# EAGLE board Board_Version_1_27_2015 (EAGLE 6.5.0)
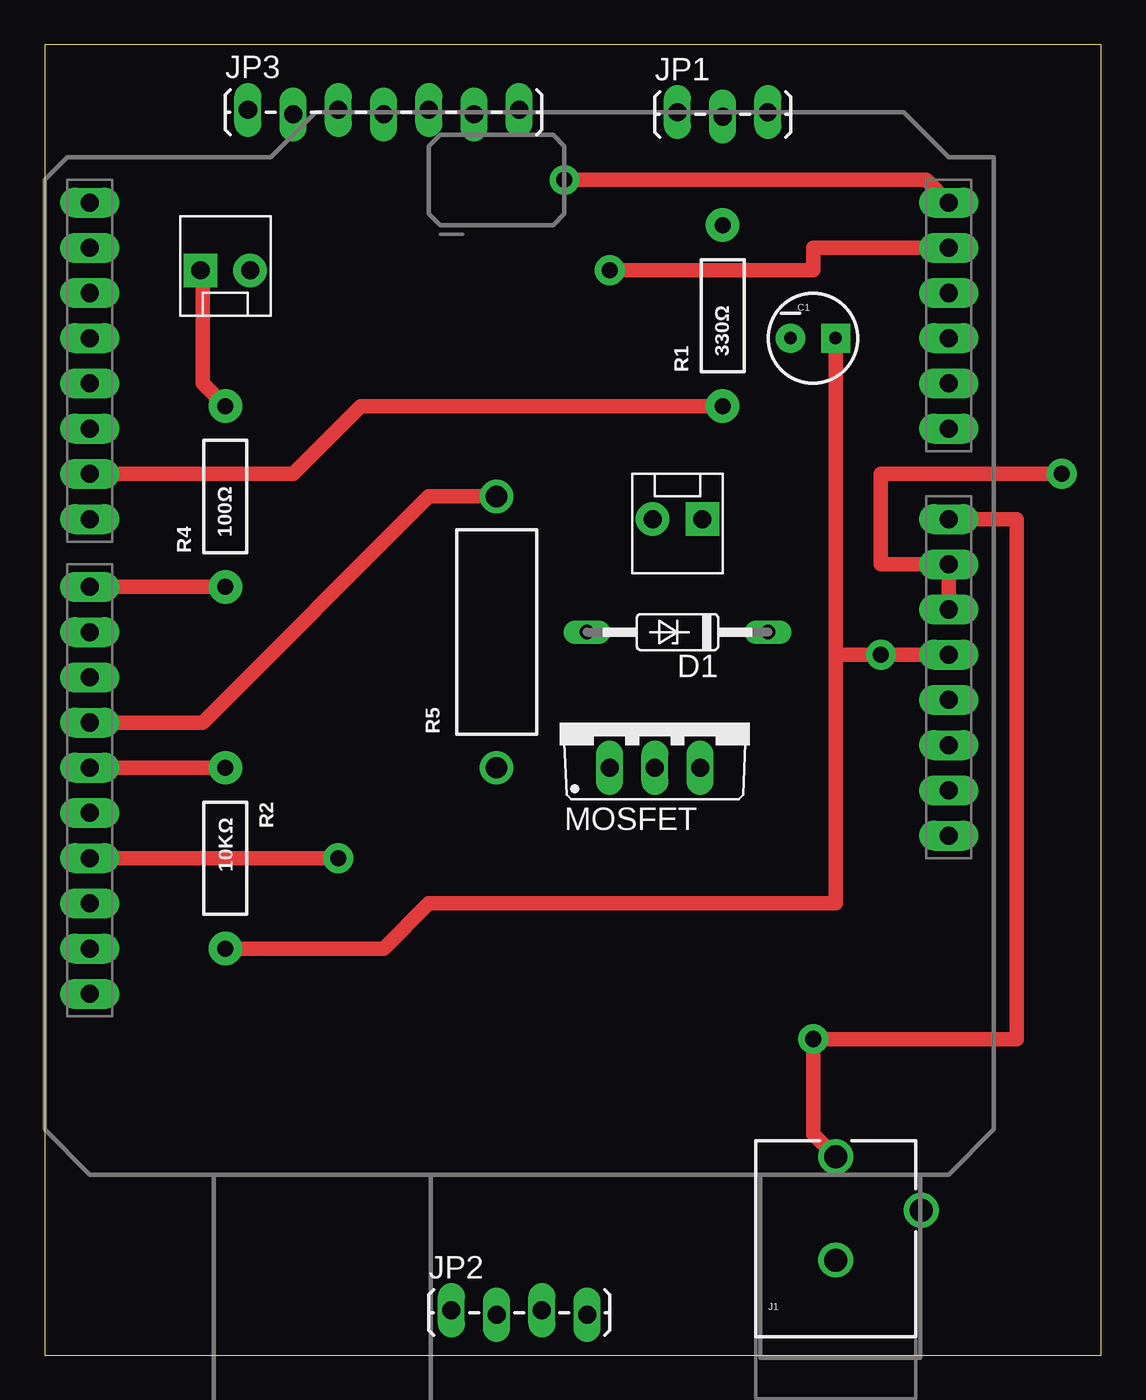
[diagram p0: board, top side]
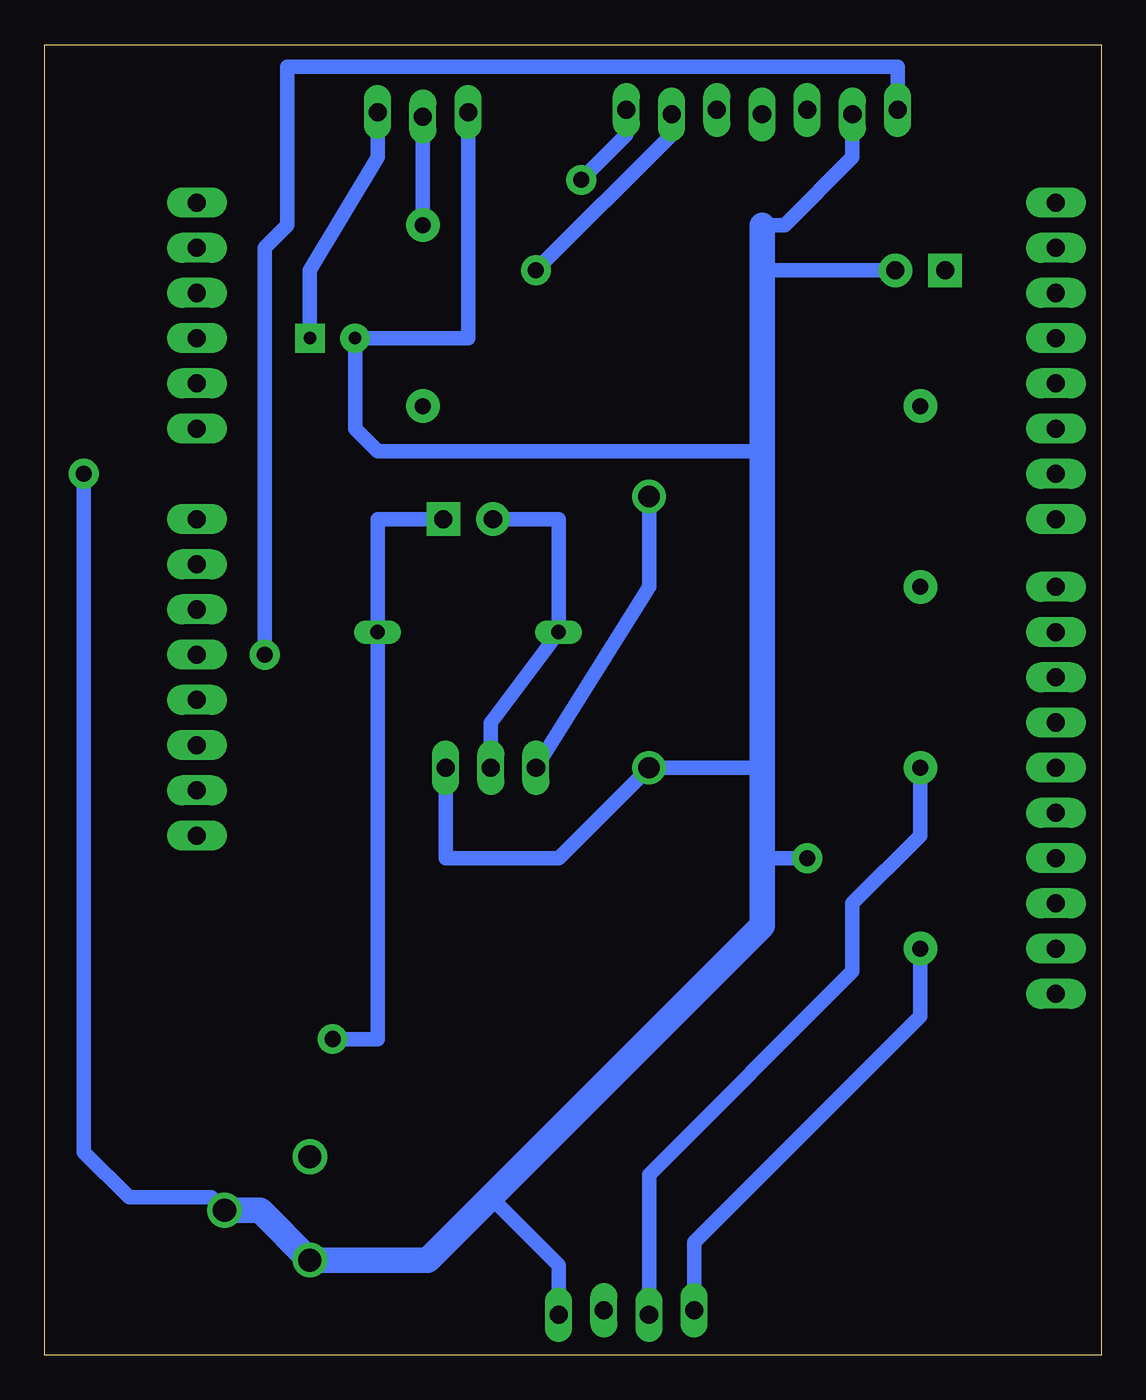
[diagram p1: board, bottom side, seen from below]

Size 59.36 x 73.65 mm. Coordinates in mm from the lower left corner, seen from the top.
Outline: 0,0 59.36,0 59.36,73.65 0,73.65 0,0
Copper layers (1*16): Top 0.035mm / dielectric 1.5mm / Bottom 0.035mm
Design rules "default": minimum track width 10mil, minimum drill 24mil, track to track 8mil, track to pad 8mil, pad to pad 8mil, via to via 8mil, smd to smd 8mil, copper to edge 40mil, drill to drill 8mil, minimum pad ring 10mil, minimum via ring 8mil, stop-mask expansion 4mil, vias tented up to drill 0mil, thermal gap 10mil

## Footprints (pad centres in the part's own frame; a part is rotated, then mirrored left to right if it is on the bottom)
CPOL-RADIAL-10UF-25V = drill 0.7 pad 1.651 square: 1 1.27,0 | drill 0.7 pad 1.651: 2 -1.27,0
DO35Z10 = drill 0.813 long: A 5.08,0; C -5.08,0
POWER_JACK_PTH_BREAD = drill 1.3: GND 0,7.9; GNDBREAK 4.8,10.7; PWR 0,13.7
1X03_LOCK_LONGPADS = drill 1.016 long: 1 0,0; 2 2.54,-0.254; 3 5.08,0
1X04_LOCK_LONGPADS = drill 1.016 long: 1 0,0; 2 2.54,-0.254; 3 5.08,0; 4 7.62,-0.254
1X07_LOCK_LONGPADS = drill 1.016 long: 1 0,0.127; 2 2.54,-0.127; 3 5.08,0.127; 4 7.62,-0.127; 5 10.16,0.127; 6 12.7,-0.127; 7 15.24,0.127
MOLEX-1X2_LOCK = drill 1.016 pad 1.88 square: 1 -0.127,0 | drill 1.016 pad 1.88: 2 2.667,0
TO220BV = drill 1.016 long: D 0,-2.54; G -2.54,-2.54; S 2.54,-2.54
AXIAL-0.4 = drill 0.9 pad 1.88: P$1 -5.08,0; P$2 5.08,0
AXIAL-0.6 = drill 1.2 pad 1.88: P$1 -7.62,0; P$2 7.62,0
UNO_R3_SHIELD_NOLABELS = drill 1.016 pad 1.676 long: 3.3V 50.8,26.67; 5V 50.8,29.21; A0 50.8,41.91; A1 50.8,44.45; A2 50.8,46.99; A3 50.8,49.53; A4 50.8,52.07; A5 50.8,54.61; AREF 2.54,15.24; D2 2.54,49.53; D3 2.54,46.99; D4 2.54,44.45; D5 2.54,41.91; D6 2.54,39.37; D7 2.54,36.83; D8 2.54,33.02; D9 2.54,30.48; D10 2.54,27.94; D11 2.54,25.4; D12 2.54,22.86; D13 2.54,20.32; GND@0 50.8,31.75; GND@1 50.8,34.29; GND@2 2.54,17.78; IOREF 50.8,21.59; NC 50.8,19.05; RES 50.8,24.13; RX 2.54,54.61; SCL 2.54,10.16; SDA 2.54,12.7; TX 2.54,52.07; VIN 50.8,36.83

## Placement (x,y rotation side)
C1  100uF  [CPOL-RADIAL-10UF-25V]  43.18,57.15 0 top
D1  1N821  [DO35Z10]  35.56,40.64 180 top
J1  POWER_JACKPTH_BREAD  [POWER_JACK_PTH_BREAD]  44.45,-2.54 0 top
JP1  [1X03_LOCK_LONGPADS]  35.56,69.85 0 top
JP2  [1X04_LOCK_LONGPADS]  22.86,2.54 0 top
JP3  [1X07_LOCK_LONGPADS]  11.43,69.85 0 top
JP4  M02POLAR_LOCK  [MOLEX-1X2_LOCK]  36.83,46.99 180 top
JP5  M02POLAR_LOCK  [MOLEX-1X2_LOCK]  8.89,60.96 0 top
MOSFET  30N06L  [TO220BV]  34.29,35.56 0 top
R1  330Ω  [AXIAL-0.4]  38.1,58.42 90 top
R2  10KΩ  [AXIAL-0.4]  10.16,27.94 270 top
R4  100Ω  [AXIAL-0.4]  10.16,48.26 90 top
R5  [AXIAL-0.6]  25.4,40.64 90 top
U$1  ARDUINO_R3_SHIELDNOLABELS  [UNO_R3_SHIELD_NOLABELS]  0,10.16 0 top

## Library data of the parts
C1 R1 R2 = SparkFun-Passives
D1 = diode
J1 = SparkFun-Connectors; PROD_ID: PRT-10811
JP1-JP5 = SparkFun-Connectors
MOSFET = transistor-power
R4 R5 = SparkFun-Resistors
U$1 = SparkFun-Boards

## Nets
5V: C1.1 JP1.3 JP2.1 JP3.1 R2.P$2 U$1.5V
DHT22: JP2.2 R2.P$1 U$1.D12
GND: C1.2 J1.GND J1.GNDBREAK JP1.1 JP2.4 JP3.2 JP5.2 MOSFET.S R5.P$1 U$1.GND@0 U$1.GND@1 U$1.GND@2
M_GATE: MOSFET.G R5.P$2 U$1.D11
N$1: JP1.2 R1.P$2
N$2: R4.P$1 U$1.D8
N$4: R1.P$1 U$1.D6
N$5: D1.A JP4.2 MOSFET.D
N$6: JP5.1 R4.P$2
SCL: JP3.7 U$1.A5
SDA: JP3.6 U$1.A4
VIN: D1.C J1.PWR JP4.1 U$1.VIN

## Tracks (layer width: path | path; a pad name or v marks a point on that pad's centre or on a via)
5V  (via drill 0.9 pad 1.68)
  Top 0.813: C1.1 44.45,39.37 | 44.45,39.37 v46.99,39.37 U$1.5V | 44.45,39.37 44.45,25.4 21.59,25.4 19.05,22.86 R2.P$2
  Bottom 0.813: C1.1 44.45,60.96 40.64,67.31 JP1.3 | JP2.1 22.86,6.35 10.16,19.05 R2.P$2 | JP3.1 11.43,72.39 45.72,72.39 45.72,63.5 46.99,62.23 v46.99,39.37
DHT22
  Top 0.813: U$1.D12 R2.P$1
  Bottom 0.813: JP2.2 25.4,10.16 13.97,21.59 13.97,25.4 10.16,29.21 R2.P$1
GND  (via drill 0.9 pad 1.68)
  Top 0.813: U$1.GND@2 v16.51,27.94 | U$1.GND@0 U$1.GND@1 46.99,44.45 46.99,49.53 v57.15,49.53
  Bottom 0.813: MOSFET.S 36.83,27.94 30.48,27.94 R5.P$1 19.05,33.02 | JP1.1 35.56,57.15 C1.2 41.91,52.07 40.64,50.8 19.05,50.8 | 19.05,27.94 v16.51,27.94 | JP2.4 30.48,5.08 34.29,8.89 | JP5.2 19.05,60.96 | 19.05,63.5 17.78,63.5 13.97,67.31 JP3.2 | v57.15,49.53 57.15,11.43 54.61,8.89 49.98,8.89 J1.GNDBREAK
  Bottom 1.422: J1.GNDBREAK 47.25,8.16 J1.GND 37.82,5.36 34.29,8.89 19.05,24.13 19.05,27.94 19.05,33.02 19.05,50.8 19.05,60.96 19.05,63.5
M_GATE
  Top 0.813: U$1.D11 8.89,35.56 21.59,48.26 R5.P$2
  Bottom 0.813: R5.P$2 25.4,43.18 MOSFET.G
N$1
  Bottom 0.813: JP1.2 R1.P$2
N$2
  Top 0.813: U$1.D8 R4.P$1
N$4
  Top 0.813: U$1.D6 13.97,49.53 17.78,53.34 R1.P$1
N$5
  Bottom 0.813: MOSFET.D 34.29,35.56 D1.A 30.48,46.99 JP4.2
N$6
  Top 0.813: R4.P$2 8.89,54.61 8.89,60.83 JP5.1
SCL  (via drill 0.9 pad 1.68)
  Top 0.813: v29.21,66.04 49.53,66.04 U$1.A5
  Bottom 0.813: JP3.7 26.67,68.58 v29.21,66.04
SDA  (via drill 0.9 pad 1.68)
  Top 0.813: v31.75,60.96 43.18,60.96 43.18,62.23 U$1.A4
  Bottom 0.813: JP3.6 24.13,68.58 v31.75,60.96
VIN  (via drill 0.9 pad 1.68)
  Top 0.813: J1.PWR 43.18,12.43 v43.18,17.78 54.61,17.78 54.61,46.99 U$1.VIN
  Bottom 0.813: v43.18,17.78 40.64,17.78 D1.C 40.64,46.99 JP4.1